# EAGLE board 6809 EXPANDED V2 SBC (EAGLE 7.7.0)
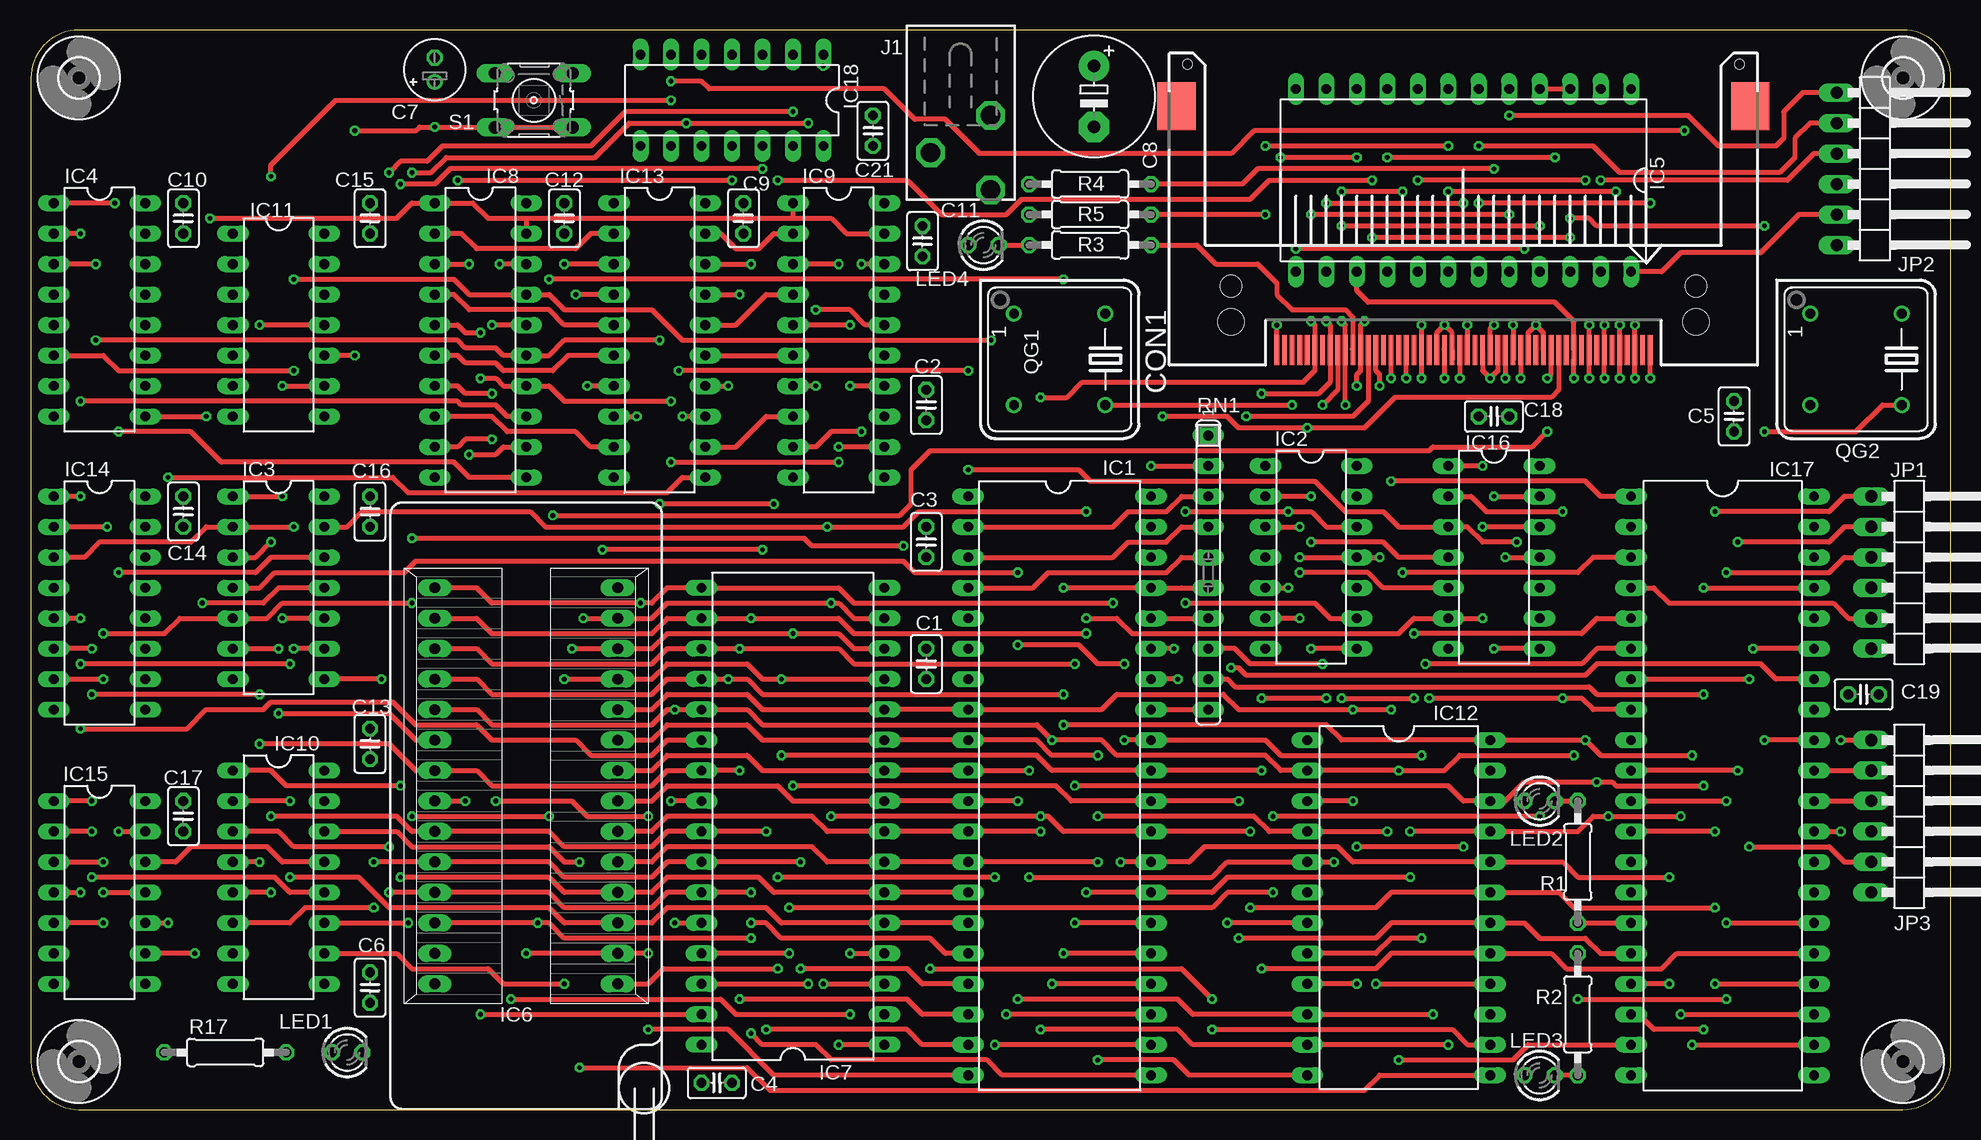
[diagram p0: board, top side]
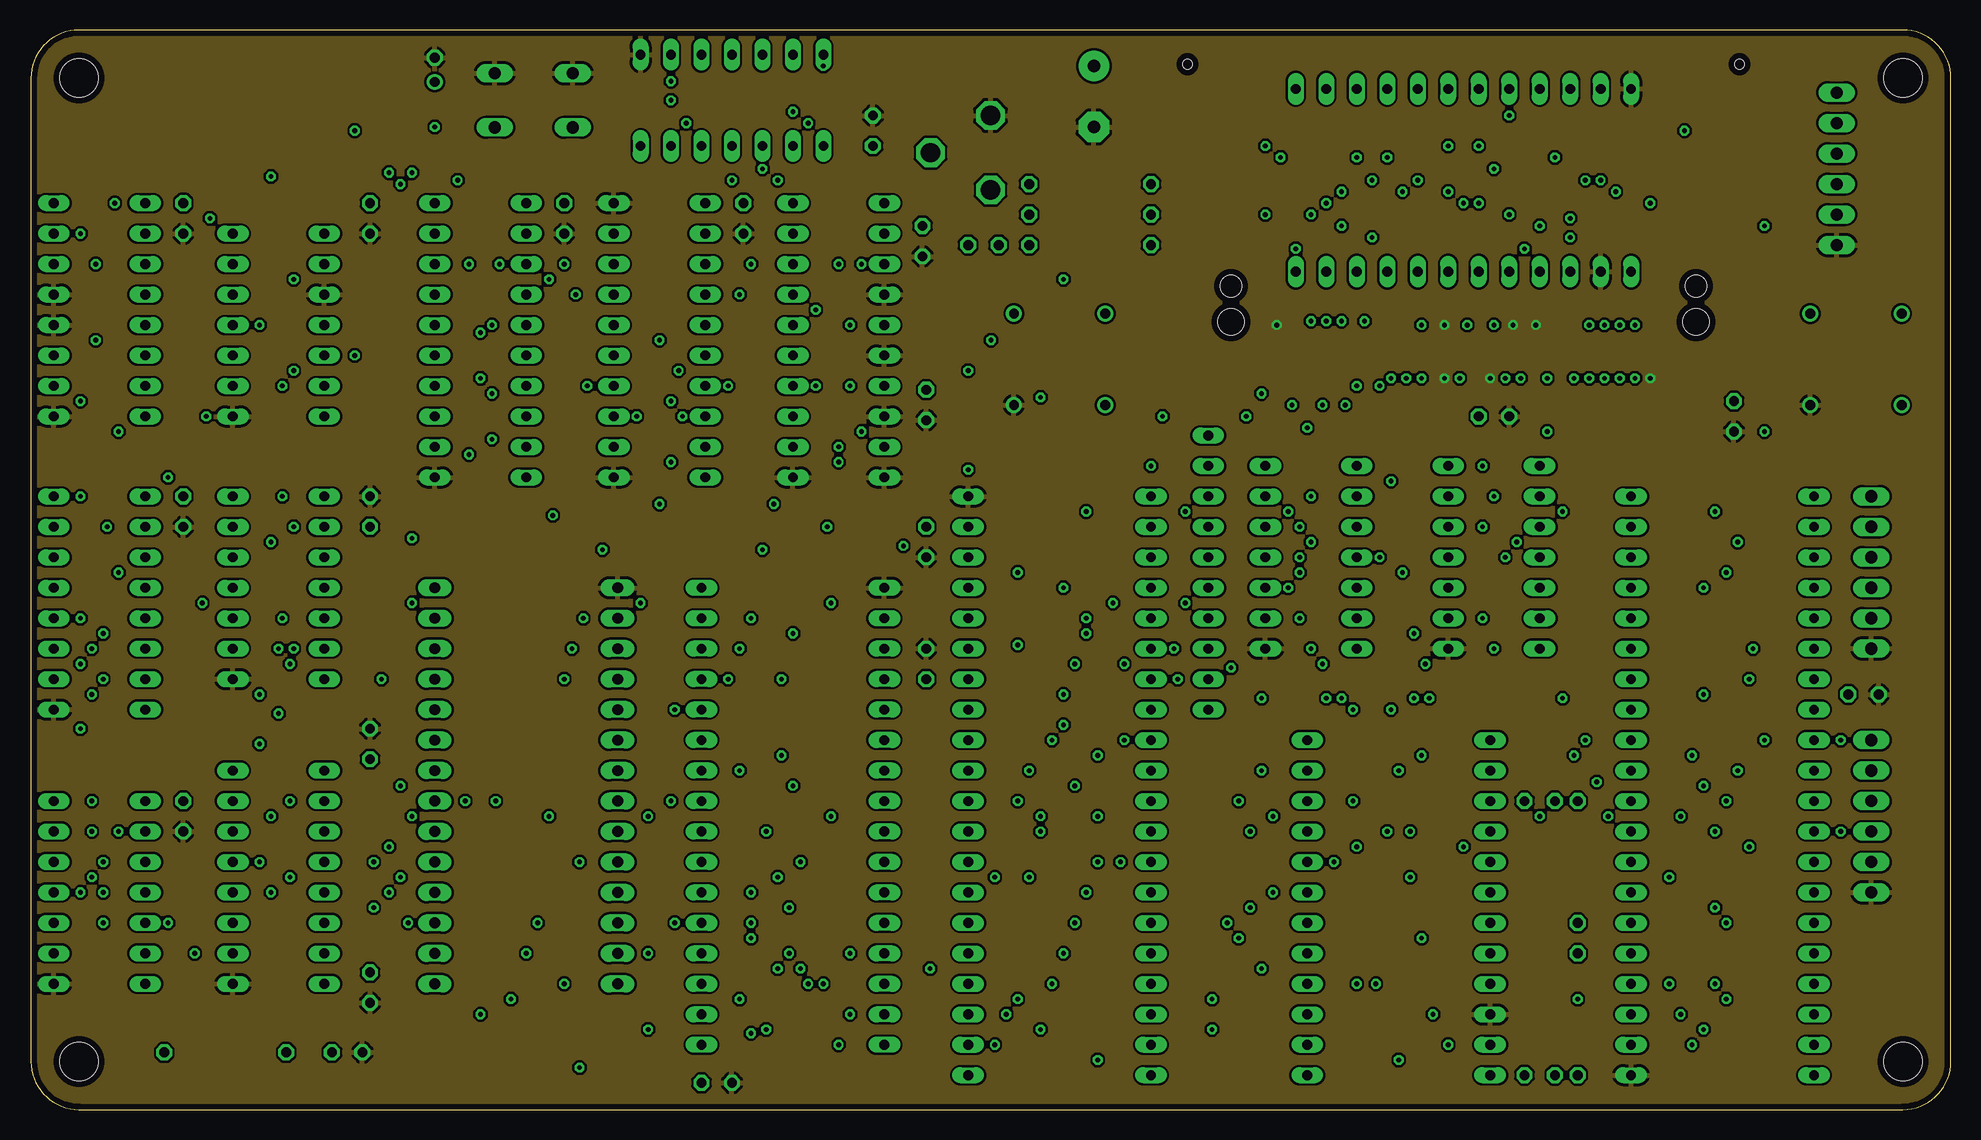
[diagram p1: board, inner layer Route2]
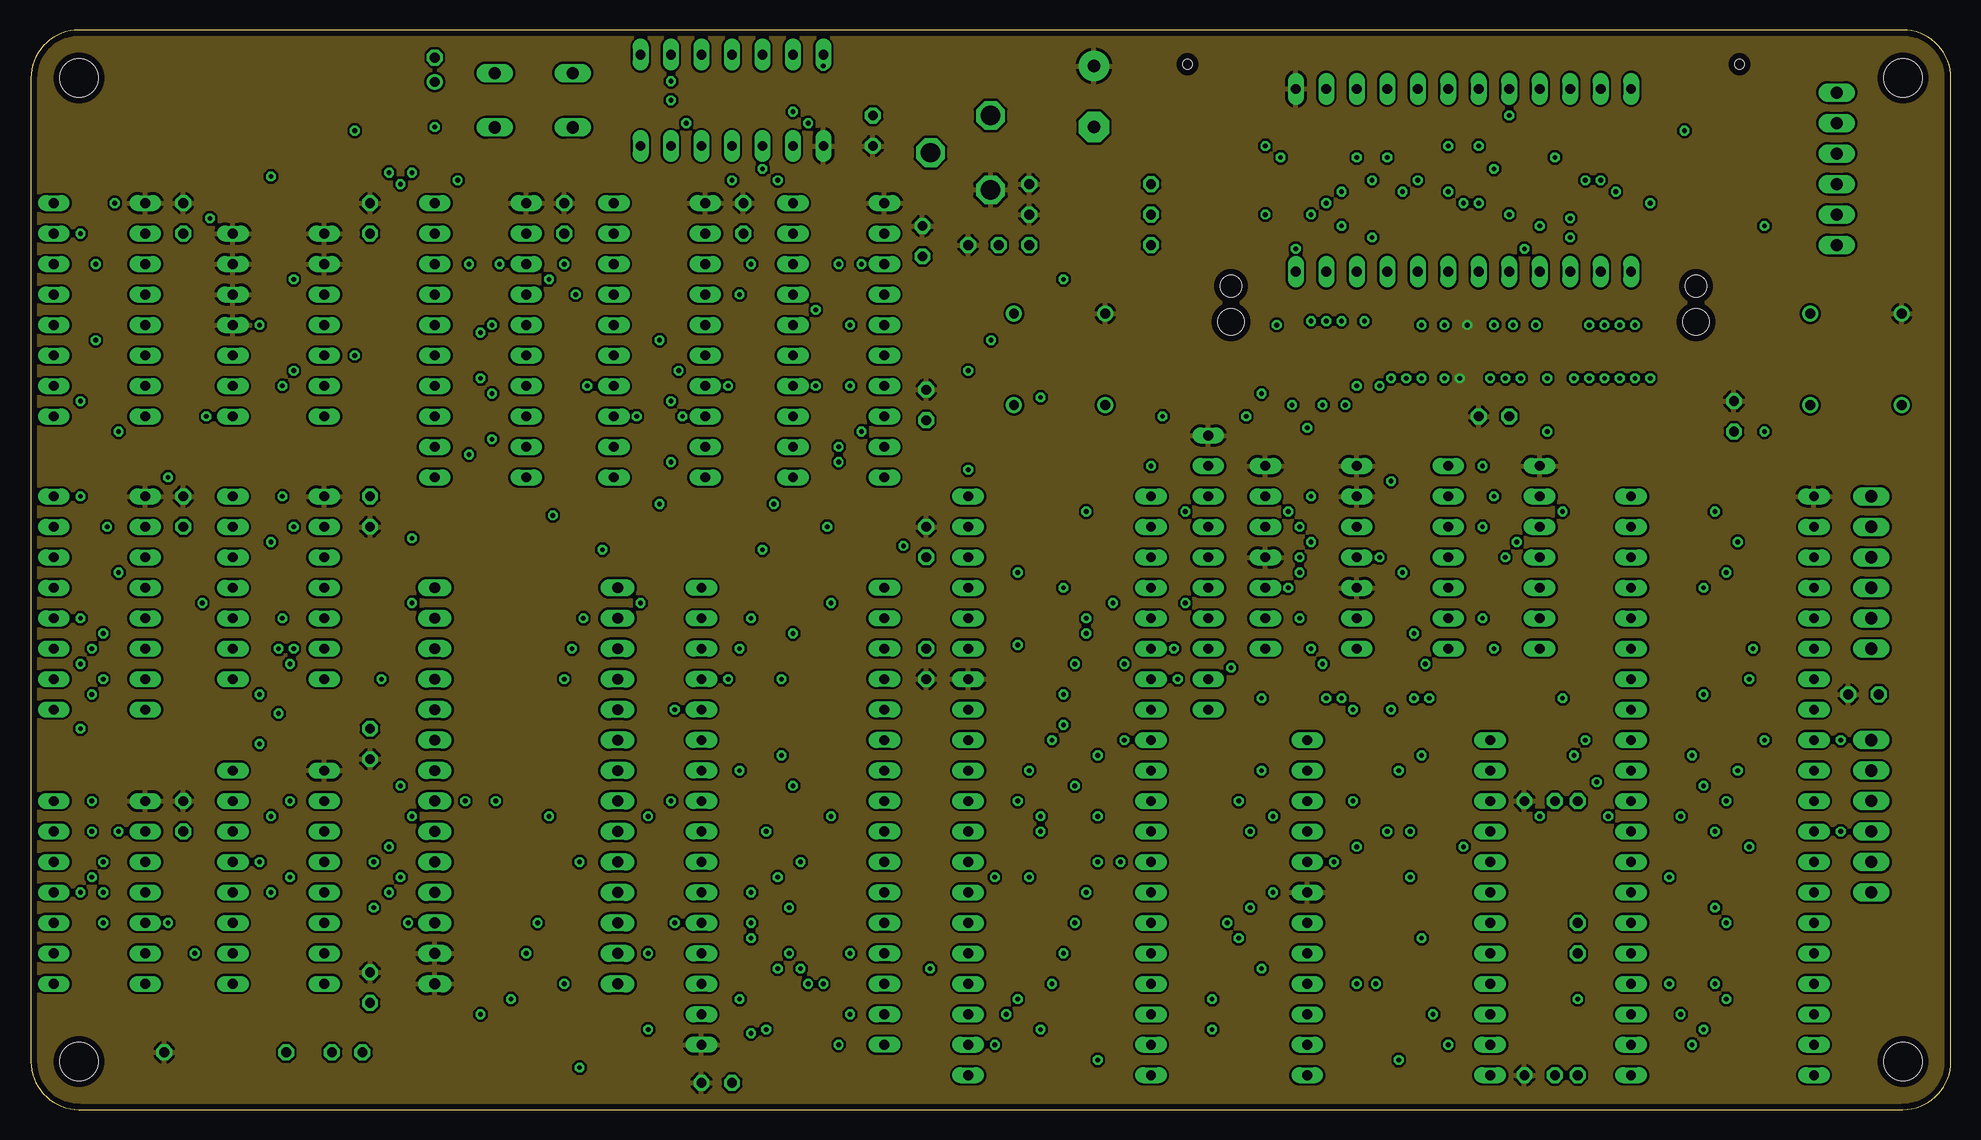
[diagram p2: board, inner layer Route15]
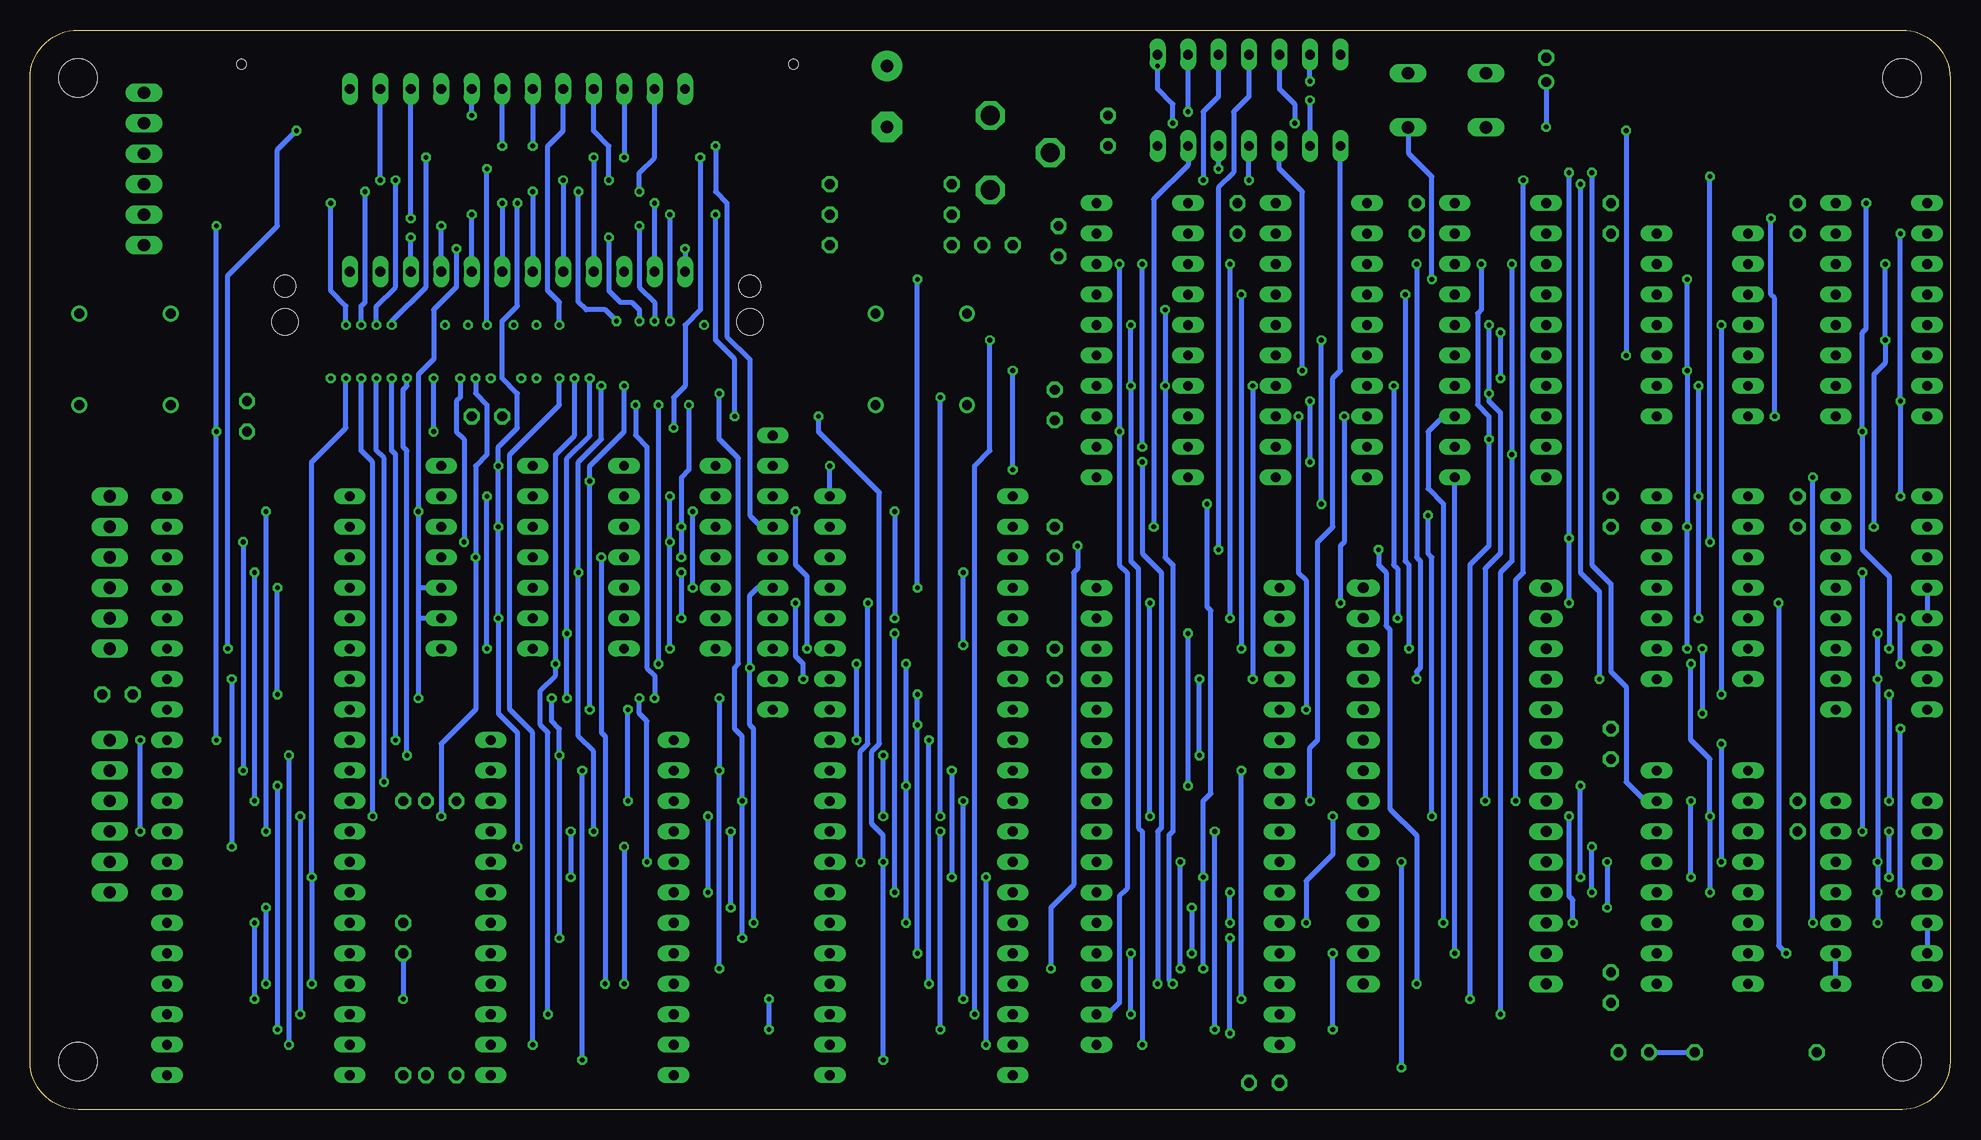
[diagram p3: board, bottom side, seen from below]

Size 160 x 90 mm. Coordinates in mm from the lower left corner, seen from the top.
Outline: 156,90 4,90 arc90 0,86 0,4 arc90 4,0 156,0 arc90 160,4 160,86 arc90 156,90
Copper layers (1*2*15*16): Top 0.035mm / dielectric 1.5mm / Route2 0.035mm / dielectric 0.15mm / Route15 0.035mm / dielectric 0.2mm / Bottom 0.035mm
Design rules "default *": minimum track width 10mil, minimum drill 12mil, track to track 8mil, track to pad 8mil, pad to pad 8mil, via to via 8mil, smd to smd 8mil, copper to edge 20mil, drill to drill 8mil, minimum pad ring 10mil, minimum via ring 8mil, stop-mask expansion 4mil, vias tented up to drill 0mil, thermal gap 10mil

## Footprints (pad centres in the part's own frame; a part is rotated, then mirrored left to right if it is on the bottom)
C025-025X050 = drill 0.813 octagon: 1 -1.27,0; 2 1.27,0
E2-5 = drill 0.813 pad 1.27: + -1.016,0 | drill 0.813 pad 1.27 octagon: - 1.016,0
E5-10,5 = drill 1.016 pad 2.54: + -2.54,0 | drill 1.016 pad 2.54 octagon: - 2.54,0
MI20-50PD-SF = smd 0.4 x 2.5: 1 15.557,-19.25; 2 14.287,-19.25; 3 13.018,-19.25; 4 11.748,-19.25; 5 10.477,-19.25; 6 9.207,-19.25; 7 7.938,-19.25; 8 6.668,-19.25; 9 5.397,-19.25; 10 4.128,-19.25; 11 2.857,-19.25; 12 1.587,-19.25; 13 0.318,-19.25; 14 -0.953,-19.25; 15 -2.223,-19.25; 16 -3.493,-19.25; 17 -4.763,-19.25; 18 -6.032,-19.25; 19 -7.303,-19.25; 20 -8.572,-19.25; 21 -9.842,-19.25; 22 -11.113,-19.25; 23 -12.383,-19.25; 24 -13.652,-19.25; 25 -14.922,-19.25; 26 14.922,-19.25; 27 13.652,-19.25; 28 12.383,-19.25; 29 11.113,-19.25; 30 9.842,-19.25; 31 8.572,-19.25; 32 7.303,-19.25; 33 6.032,-19.25; 34 4.763,-19.25; 35 3.493,-19.25; 36 2.223,-19.25; 37 0.953,-19.25; 38 -0.318,-19.25; 39 -1.587,-19.25; 40 -2.857,-19.25; 41 -4.128,-19.25; 42 -5.397,-19.25; 43 -6.668,-19.25; 44 -7.938,-19.25; 45 -9.207,-19.25; 46 -10.477,-19.25; 47 -11.748,-19.25; 48 -13.018,-19.25; 49 -14.287,-19.25; 50 -15.557,-19.25 | smd 3.2 x 4: M1 -23.9,1.1; M2 23.9,1.1 | hole 2.2: -19.37,-16.9; 19.37,-16.9 | hole 1.8: -19.37,-13.9; 19.37,-13.9 | hole 0.8: -23,4.6; 23,4.6
3,2 = hole 3.2: 0,0
DIL40 = drill 0.813 long: 1 -24.13,-7.62; 2 -21.59,-7.62; 3 -19.05,-7.62; 4 -16.51,-7.62; 5 -13.97,-7.62; 6 -11.43,-7.62; 7 -8.89,-7.62; 8 -6.35,-7.62; 9 -3.81,-7.62; 10 -1.27,-7.62; 11 1.27,-7.62; 12 3.81,-7.62; 13 6.35,-7.62; 14 8.89,-7.62; 15 11.43,-7.62; 16 13.97,-7.62; 17 16.51,-7.62; 18 19.05,-7.62; 19 21.59,-7.62; 20 24.13,-7.62; 21 24.13,7.62; 22 21.59,7.62; 23 19.05,7.62; 24 16.51,7.62; 25 13.97,7.62; 26 11.43,7.62; 27 8.89,7.62; 28 6.35,7.62; 29 3.81,7.62; 30 1.27,7.62; 31 -1.27,7.62; 32 -3.81,7.62; 33 -6.35,7.62; 34 -8.89,7.62; 35 -11.43,7.62; 36 -13.97,7.62; 37 -16.51,7.62; 38 -19.05,7.62; 39 -21.59,7.62; 40 -24.13,7.62
DIL14 = drill 0.813 long: 1 -7.62,-3.81; 2 -5.08,-3.81; 3 -2.54,-3.81; 4 0,-3.81; 5 2.54,-3.81; 6 5.08,-3.81; 7 7.62,-3.81; 8 7.62,3.81; 9 5.08,3.81; 10 2.54,3.81; 11 0,3.81; 12 -2.54,3.81; 13 -5.08,3.81; 14 -7.62,3.81
DIL16 = drill 0.813 long: 1 -8.89,-3.81; 2 -6.35,-3.81; 3 -3.81,-3.81; 4 -1.27,-3.81; 5 1.27,-3.81; 6 3.81,-3.81; 7 6.35,-3.81; 8 8.89,-3.81; 9 8.89,3.81; 10 6.35,3.81; 11 3.81,3.81; 12 1.27,3.81; 13 -1.27,3.81; 14 -3.81,3.81; 15 -6.35,3.81; 16 -8.89,3.81
DIL24 = drill 0.813 long: 1 -13.97,-7.62; 2 -11.43,-7.62; 3 -8.89,-7.62; 4 -6.35,-7.62; 5 -3.81,-7.62; 6 -1.27,-7.62; 7 1.27,-7.62; 8 3.81,-7.62; 9 6.35,-7.62; 10 8.89,-7.62; 11 11.43,-7.62; 12 13.97,-7.62; 13 13.97,7.62; 14 11.43,7.62; 15 8.89,7.62; 16 6.35,7.62; 17 3.81,7.62; 18 1.27,7.62; 19 -1.27,7.62; 20 -3.81,7.62; 21 -6.35,7.62; 22 -8.89,7.62; 23 -11.43,7.62; 24 -13.97,7.62
228-1277-00-0602J = drill 0.9 long: 1 -16.51,-7.62; 2 -13.97,-7.62; 3 -11.43,-7.62; 4 -8.89,-7.62; 5 -6.35,-7.62; 6 -3.81,-7.62; 7 -1.27,-7.62; 8 1.27,-7.62; 9 3.81,-7.62; 10 6.35,-7.62; 11 8.89,-7.62; 12 11.43,-7.62; 13 13.97,-7.62; 14 16.51,-7.62; 15 16.51,7.62; 16 13.97,7.62; 17 11.43,7.62; 18 8.89,7.62; 19 6.35,7.62; 20 3.81,7.62; 21 1.27,7.62; 22 -1.27,7.62; 23 -3.81,7.62; 24 -6.35,7.62; 25 -8.89,7.62; 26 -11.43,7.62; 27 -13.97,7.62; 28 -16.51,7.62
DIL32 = drill 0.813 long: 1 -19.05,-7.62; 2 -16.51,-7.62; 3 -13.97,-7.62; 4 -11.43,-7.62; 5 -8.89,-7.62; 6 -6.35,-7.62; 7 -3.81,-7.62; 8 -1.27,-7.62; 9 1.27,-7.62; 10 3.81,-7.62; 11 6.35,-7.62; 12 8.89,-7.62; 13 11.43,-7.62; 14 13.97,-7.62; 15 16.51,-7.62; 16 19.05,-7.62; 17 19.05,7.62; 18 16.51,7.62; 19 13.97,7.62; 20 11.43,7.62; 21 8.89,7.62; 22 6.35,7.62; 23 3.81,7.62; 24 1.27,7.62; 25 -1.27,7.62; 26 -3.81,7.62; 27 -6.35,7.62; 28 -8.89,7.62; 29 -11.43,7.62; 30 -13.97,7.62; 31 -16.51,7.62; 32 -19.05,7.62
DIL20 = drill 0.813 long: 1 -11.43,-3.81; 2 -8.89,-3.81; 3 -6.35,-3.81; 4 -3.81,-3.81; 5 -1.27,-3.81; 6 1.27,-3.81; 7 3.81,-3.81; 8 6.35,-3.81; 9 8.89,-3.81; 10 11.43,-3.81; 11 11.43,3.81; 12 8.89,3.81; 13 6.35,3.81; 14 3.81,3.81; 15 1.27,3.81; 16 -1.27,3.81; 17 -3.81,3.81; 18 -6.35,3.81; 19 -8.89,3.81; 20 -11.43,3.81
DIL24-6 = drill 0.813 long: 1 -13.97,-7.62; 2 -11.43,-7.62; 3 -8.89,-7.62; 4 -6.35,-7.62; 5 -3.81,-7.62; 6 -1.27,-7.62; 7 1.27,-7.62; 8 3.81,-7.62; 9 6.35,-7.62; 10 8.89,-7.62; 11 11.43,-7.62; 12 13.97,-7.62; 13 13.97,7.62; 14 11.43,7.62; 15 8.89,7.62; 16 6.35,7.62; 17 3.81,7.62; 18 1.27,7.62; 19 -1.27,7.62; 20 -3.81,7.62; 21 -6.35,7.62; 22 -8.89,7.62; 23 -11.43,7.62; 24 -13.97,7.62
FCR681465P = drill 1.6 octagon: 1 -6.2,-2.5; 2 -3.1,2.5; 3 0,-2.5
1X06/90 = drill 1.016 long: 1 -6.35,-3.81; 2 -3.81,-3.81; 3 -1.27,-3.81; 4 1.27,-3.81; 5 3.81,-3.81; 6 6.35,-3.81
LED3MM = drill 0.813 octagon: A -1.27,0; K 1.27,0
DIL08S = drill 0.813: 1 -3.81,-3.81; 4 3.81,-3.81; 5 3.81,3.81; 8 -3.81,3.81
0207/10 = drill 0.813 octagon: 1 -5.08,0; 2 5.08,0
SIL10 = drill 0.813 long: 1 -11.43,0; 2 -8.89,0; 3 -6.35,0; 4 -3.81,0; 5 -1.27,0; 6 1.27,0; 7 3.81,0; 8 6.35,0; 9 8.89,0; 10 11.43,0
B3F-10XX = drill 1.016 long: 1 -3.251,2.261; 2 3.251,2.261; 3 -3.251,-2.261; 4 3.251,-2.261

## Placement (x,y rotation side)
C1  [C025-025X050]  74.61,37.15 90 top
C2  [C025-025X050]  74.61,58.74 270 top
C3  [C025-025X050]  74.61,47.31 270 top
C4  [C025-025X050]  57.15,2.22 0 top
C5  [C025-025X050]  141.92,57.78 270 top
C6  [C025-025X050]  28.26,10.16 270 top
C7  [E2-5]  33.66,86.68 90 top
C8  470uF  [E5-10,5]  88.58,84.45 270 top
C9  [C025-025X050]  59.37,74.3 270 top
C10  [C025-025X050]  12.7,74.3 270 top
C11  [C025-025X050]  74.3,72.39 270 top
C12  [C025-025X050]  44.45,74.3 270 top
C13  [C025-025X050]  28.26,30.48 90 top
C14  [C025-025X050]  12.7,49.85 270 top
C15  [C025-025X050]  28.26,74.3 270 top
C16  [C025-025X050]  28.26,49.85 90 top
C17  [C025-025X050]  12.7,24.45 270 top
C18  [C025-025X050]  121.92,57.78 0 top
C19  [C025-025X050]  152.72,34.61 0 top
C21  [C025-025X050]  70.17,81.6 90 top
CON1  [MI20-50PD-SF]  119.38,82.55 0 top
H1  MOUNT-HOLE3.2  [3,2]  4,86 0 top
H2  MOUNT-HOLE3.2  [3,2]  156,86 0 top
H3  MOUNT-HOLE3.2  [3,2]  4,4 0 top
H4  MOUNT-HOLE3.2  [3,2]  156,4 0 top
IC1  [DIL40]  85.72,26.99 270 top
IC2  74HC74N  [DIL14]  106.68,46.04 270 top
IC3  74HC00N  [DIL14]  20.64,43.5 270 top
IC4  74HC138N  [DIL16]  5.71,66.67 270 top
IC5  [DIL24]  119.38,77.47 180 top
IC6  AT28C256ZIF  [228-1277-00-0602J]  41.27,26.99 90 top
IC7  [DIL32]  63.5,24.45 90 top
IC8  74HC241N  [DIL20]  37.47,64.14 270 top
IC9  74HC241N  [DIL20]  67.31,64.14 270 top
IC10  74HC138N  [DIL16]  20.64,19.37 270 top
IC11  74HC74N  [DIL14]  20.64,65.41 270 top
IC12  MC6859  [DIL24-6]  113.98,16.83 270 top
IC13  74HC373N  [DIL20]  52.39,64.14 270 top
IC14  74HC138N  [DIL16]  5.71,42.23 270 top
IC15  74HC02N  [DIL14]  5.71,18.1 270 top
IC16  74HC00N  [DIL14]  121.92,46.04 270 top
IC17  [DIL40]  140.97,26.99 270 top
IC18  74HC32N  [DIL14]  58.42,84.14 180 top
J1  FCR681465P  [FCR681465P]  77.47,82.87 90 top
JP1  [1X06/90]  157.16,44.77 270 top
JP2  [1X06/90]  154.31,78.42 270 top
JP3  [1X06/90]  157.16,24.45 270 top
LED1  [LED3MM]  26.35,4.76 0 top
LED2  [LED3MM]  125.73,25.72 0 top
LED3  [LED3MM]  125.73,2.86 0 top
LED4  [LED3MM]  79.38,72.07 0 top
QG1  [DIL08S]  85.72,62.55 270 top
QG2  [DIL08S]  152.08,62.55 270 top
R1  470R  [0207/10]  128.91,20.64 90 top
R2  470R  [0207/10]  128.91,7.94 270 top
R3  470R  [0207/10]  88.27,72.07 180 top
R4  2k2  [0207/10]  88.27,77.15 180 top
R5  2k2  [0207/10]  88.27,74.61 180 top
R17  470R  [0207/10]  16.19,4.76 0 top
RN1  [SIL10]  98.11,44.77 270 top
S1  [B3F-10XX]  41.91,84.14 180 top

## Library data of the parts
C1-C19 C21 R1-R5 R17 = rcl
CON1 = LTA_connectors; OC_FARNELL: unknown; OC_NEWARK: unknown
H1-H4 = holes
IC1 = micro-motorola; MF: NTE ELECTRONICS; MPN: NTE6809E; OC_FARNELL: unknown; OC_NEWARK: 31C5318
IC2-IC4 IC8-IC11 IC13-IC16 IC18 = 74xx-eu
IC5 = micro-motorola; MF: NTE ELECTRONICS; MPN: NTE6850; OC_FARNELL: 4899775; OC_NEWARK: 31C2457
IC6 IC7 IC12 = LTA_semis
IC17 = micro-mc68000; OC_FARNELL: unknown; OC_NEWARK: unknown
J1 = PowerCon
JP1-JP3 = pinhead
LED1-LED4 = led
QG1 QG2 = crystal; OC_FARNELL: unknown; OC_NEWARK: unknown
RN1 = resistor-sil; OC_FARNELL: unknown; OC_NEWARK: unknown
S1 = switch-omron; MPN: B3F-1000; OC_FARNELL: 176432; OC_NEWARK: 36M3542

## Nets
0V: C1.2 C2.2 C3.2 C4.2 C5.2 C6.2 C7.- C8.- C9.2 C10.2 C11.2 C12.2 C13.2 C14.2 C15.2 C16.2 C17.2 C18.2 C19.2 C21.2 CON1.1 CON1.8 CON1.9 CON1.10 CON1.11 CON1.12 CON1.14 CON1.15 CON1.39 CON1.50 IC1.1 IC2.7 IC3.7 IC4.4 IC4.5 IC4.8 IC5.1 IC5.23 IC6.14 IC7.16 IC8.10 IC9.10 IC9.11 IC9.13 IC9.15 IC9.17 IC10.8 IC11.7 IC11.12 IC12.15 IC13.1 IC13.10 IC14.8 IC15.7 IC16.7 IC17.20 IC18.7 J1.3 JP1.6 JP2.6 JP3.6 LED1.K QG1.4 QG2.4 S1.3 S1.4
+5V: C1.1 C2.1 C3.1 C4.1 C5.1 C6.1 C8.+ C9.1 C10.1 C11.1 C12.1 C13.1 C14.1 C15.1 C16.1 C17.1 C18.1 C19.1 C21.1 CON1.13 CON1.38 IC1.7 IC2.1 IC2.4 IC2.10 IC2.13 IC2.14 IC3.14 IC4.16 IC5.12 IC6.27 IC6.28 IC7.32 IC8.20 IC9.20 IC10.16 IC11.1 IC11.2 IC11.3 IC11.4 IC11.13 IC11.14 IC12.6 IC13.20 IC14.16 IC15.14 IC16.14 IC17.40 IC18.14 J1.1 LED2.A LED3.A LED4.A QG1.8 QG2.8 R4.2 R5.2 R17.1 RN1.1
A0: CON1.20 IC1.8 IC5.11 IC6.10 IC7.12 IC12.3 IC17.1
A1: CON1.19 IC1.9 IC6.9 IC7.11 IC12.4 IC17.3
A2: CON1.18 IC1.10 IC6.8 IC7.10 IC12.5 IC17.5
A3: CON1.17 IC1.11 IC6.7 IC7.9 IC12.10 IC17.6
A4: CON1.16 IC1.12 IC5.8 IC6.6 IC7.8 IC12.11
A5: CON1.7 IC1.13 IC5.10 IC6.5 IC7.7 IC12.12
A6: IC1.14 IC6.4 IC7.6 IC10.1
A7: IC1.15 IC6.3 IC7.5 IC10.2
A8: IC1.16 IC6.25 IC7.27 IC10.3
A9: IC1.17 IC6.24 IC7.26 IC10.6
A10: IC1.18 IC6.21 IC7.23 IC10.4
A11: IC1.19 IC6.23 IC7.25 IC10.5 IC14.4 IC14.5
A12: IC1.20 IC4.1 IC6.2 IC8.11 IC14.6
A13: IC1.21 IC4.2 IC6.26 IC8.13 IC14.1
A14: IC1.22 IC4.3 IC6.1 IC8.15 IC14.2
A15: IC1.23 IC3.2 IC3.9 IC4.6 IC8.17 IC14.3
CFEN: CON1.32 IC10.11
D0: CON1.21 IC1.31 IC5.22 IC6.11 IC7.13 IC12.17 IC13.3 IC17.25
D1: CON1.22 IC1.30 IC5.21 IC6.12 IC7.14 IC12.18 IC13.4 IC17.16
D2: CON1.23 IC1.29 IC5.20 IC6.13 IC7.15 IC12.19 IC13.7 IC17.24
D3: CON1.2 IC1.28 IC5.19 IC6.15 IC7.17 IC12.20 IC13.8 IC17.17
D4: CON1.3 IC1.27 IC5.18 IC6.16 IC7.18 IC12.21 IC13.18 IC17.23
D5: CON1.4 IC1.26 IC5.17 IC6.17 IC7.19 IC12.22 IC13.17 IC17.18
D6: CON1.5 IC1.25 IC5.16 IC6.18 IC7.20 IC12.24 IC13.14 IC17.22
D7: CON1.6 IC1.24 IC5.15 IC6.19 IC7.21 IC12.2 IC13.13 IC17.19
E+: IC3.13 IC5.14 IC12.9 IC16.1 IC16.6 IC16.12 IC18.13
IACK: IC17.37 RN1.9
IOSEL: IC3.5 IC12.14 IC14.7 IC15.3 IC15.5 IC15.6 IC15.11 IC18.1 IC18.5
N$1: IC2.6 IC16.5
N$2: IC2.2 IC2.8 IC16.4
N$3: IC2.3 IC2.11 IC12.16 QG1.5
N$4: IC1.4 RN1.5
N$5: IC1.35 IC2.5 IC2.12
N$6: IC3.12 IC15.13
N$7: IC10.13 IC15.12
N$8: IC3.11 IC15.8 IC15.9
N$9: IC1.34 IC2.9
N$10: IC17.35 IC18.6
N$11: IC3.1 IC3.10 IC11.9
N$12: IC7.22 IC15.4
N$13: IC10.12 IC15.2
N$14: IC3.3 IC18.9
N$15: IC11.11 IC15.1
N$16: IC7.24 IC18.8
N$17: IC6.22 IC18.11
N$18: IC9.2 IC13.19
N$19: IC13.11 IC15.10
N$21: IC16.8 IC16.13
N$23: IC3.8 IC18.12
N$24: IC10.14 IC12.13
N$25: IC5.5 JP2.1
N$26: LED1.A R17.2
N$28: IC17.31 JP3.2
N$29: IC17.30 JP3.3
N$30: IC1.40 RN1.2
N$31: IC17.11 JP1.3
N$32: IC17.10 JP1.2
N$33: IC3.6 IC6.20
N$34: IC17.7 JP3.5
N$35: IC17.4 JP1.5
N$36: IC1.36 RN1.7
N$37: IC1.33 RN1.10
N$38: IC1.3 IC5.7 RN1.4
N$39: IC17.29 JP3.1
N$40: IC5.24 JP2.5
N$41: LED3.K R2.2
N$42: IC1.2 RN1.3
N$43: IC17.12 JP1.1
N$44: LED2.K R1.2
N$45: IC5.6 JP2.2
N$46: IC5.2 JP2.3
N$47: IC4.9 IC8.1 IC8.19 IC9.1 IC9.19
N$48: IC7.4 IC8.9 IC8.18
N$49: IC7.28 IC8.7 IC8.16
N$50: IC7.3 IC8.5 IC8.14
N$51: IC7.31 IC8.3 IC8.12
N$52: IC9.8 IC13.12
N$53: IC10.15 IC18.2
N$54: IC9.4 IC13.16
N$55: IC9.6 IC13.15
N$56: IC7.2 IC9.9 IC9.18
N$57: IC7.30 IC9.7 IC9.16
N$58: IC7.1 IC9.5 IC9.14
N$59: IC9.3 IC9.12
N$60: IC17.26 R2.1
N$61: IC8.8 IC13.9
N$62: IC8.6 IC13.6
N$63: IC8.4 IC13.5
N$64: IC8.2 IC13.2
N$65: IC17.15 R1.1
N$66: CON1.45 R3.1
N$67: LED4.K R3.2
N$68: CON1.44 R5.1
N$69: CON1.36 R4.1
N$71: IC5.9 IC18.3
PDIAG: CON1.46 RN1.8
RDN: CON1.34 IC16.3 IC18.10
RESET: C7.+ IC1.37 IC11.10 IC12.7 IC17.34 RN1.6 S1.1 S1.2
RW: IC1.32 IC3.4 IC5.13 IC12.8 IC16.2 IC16.9 IC16.10 IC17.8
SCLK: IC5.3 IC5.4 IC17.32 QG2.5
SEREN: IC10.10 IC18.4
WRN: CON1.35 IC7.29 IC16.11

## Tracks (layer width: path | path; a pad name or v marks a point on that pad's centre or on a via)
0V  (via drill 0.4)
  Top 0.406: v103.82,65.41 CON1.50 103.82,62.5 | v134.94,60.96 CON1.1 | v123.51,65.41 CON1.10 123.51,62.5 | CON1.11 122.24,61.59 v121.6,60.96 120.97,61.59 CON1.12 | 117.16,62.5 CON1.15 117.16,64.77 v117.79,65.41 118.43,64.77 CON1.14 118.43,62.5 | 126.05,62.5 CON1.8 126.05,64.77 v125.41,65.41 124.78,64.77 CON1.9 124.78,62.5 | CON1.39 117.79,62.87 | CON1.39 117.79,63.5 | CON1.39 v117.79,60.96
  pour Route2: 0.64,0.64 0.64,99.38 159.38,99.38 159.38,0.64
+5V  (via drill 0.4)
  Top 0.406: CON1.38 v119.06,60.96 | v119.7,65.41 CON1.13 119.7,62.5
  pour Route15: 0.32,0.32 0.32,99.69 159.7,99.69 159.7,0.32
A0  (via drill 0.4)
  Top 0.406: IC6.10 51.75,33.34 53.02,34.61 59.69,34.61 60.96,33.34 IC7.12 IC1.8 89.22,33.34 90.49,34.61 99.38,34.61 100.65,33.34 v110.17,33.34 v113.35,33.34 | v110.49,60.33 110.49,61.28 110.81,61.59 110.81,63.18 CON1.20 110.81,65.41 v111.12,65.72 | v110.17,25.72 IC12.3 | IC17.1 130.81,51.12 129.54,52.39 v113.35,52.39 | v114.3,76.52 v109.22,76.52
  Bottom 0.406: v110.17,25.72 v110.17,33.34 | v113.35,33.34 v113.35,52.39 113.35,53.66 110.49,56.52 v110.49,60.33 | v111.12,65.72 112.08,66.67 113.67,66.67 114.3,67.31 v114.3,76.52 | v109.22,76.52 109.22,78.11 107.95,79.38 IC5.11
A1  (via drill 0.4)
  Top 0.406: IC6.9 51.75,30.8 53.02,32.07 59.69,32.07 60.96,30.8 IC7.11 IC1.9 83.82,30.8 85.09,29.53 v88.9,29.53 | v88.9,24.45 101.92,24.45 103.19,23.18 IC12.4 v113.03,23.18 | v112.39,60.33 112.39,61.28 112.08,61.59 CON1.19 | IC17.3 130.18,46.04 128.91,44.77 v114.3,44.77
  Bottom 0.406: v88.9,24.45 v88.9,29.53 | v113.03,23.18 113.03,29.84 114.3,31.11 v114.3,44.77 114.3,53.98 112.39,55.88 v112.39,60.33
A2  (via drill 0.4)
  Top 0.406: IC6.8 51.75,28.26 53.02,29.53 59.69,29.53 60.96,28.26 IC7.10 IC1.10 v83.19,28.26 | v83.19,19.37 98.42,19.37 99.69,20.64 IC12.5 v108.58,20.64 | v109.22,34.29 v115.25,34.29 | v113.35,60.96 CON1.18 | IC17.5 130.49,40.96 129.22,39.69 v115.25,39.69
  Bottom 0.406: v83.19,28.26 v83.19,19.37 | v108.58,20.64 108.58,32.38 109.22,33.02 v109.22,34.29 | v115.25,34.29 v115.25,39.69 115.25,54.29 113.35,56.2 v113.35,60.96
A3  (via drill 0.4)
  Top 0.406: IC6.7 51.75,25.72 53.02,26.99 62.23,26.99 63.5,25.72 IC7.9 IC1.11 v82.23,25.72 | v82.23,9.21 95.57,9.21 96.84,7.94 IC12.10 v116.84,7.94 | v114.62,60.96 CON1.17 | IC17.6 130.49,38.42 129.22,37.15 v116.2,37.15
  Bottom 0.406: v82.23,9.21 v82.23,25.72 | v116.84,7.94 116.84,31.43 117.47,32.07 117.47,34.92 116.2,36.2 v116.2,37.15 116.2,54.61 114.62,56.2 v114.62,60.96
A4  (via drill 0.4)
  Top 0.406: IC6.6 51.75,23.18 53.02,24.45 65.09,24.45 66.36,23.18 IC7.8 IC1.12 v84.14,23.18 | v84.14,6.67 95.57,6.67 96.84,5.4 IC12.11 v118.11,5.4 | v115.89,60.96 CON1.16 115.89,63.82 v115.89,65.41
  Bottom 0.406: v84.14,6.67 v84.14,23.18 | v118.11,5.4 118.11,31.43 120.02,33.34 120.02,54.61 115.89,58.74 v115.89,60.96 | v115.89,65.41 115.89,67.31 116.84,68.26 116.84,80.33 115.57,81.6 IC5.8
A5  (via drill 0.4)
  Top 0.406: IC6.5 51.75,20.64 53.02,21.91 65.09,21.91 66.36,20.64 IC7.7 IC1.13 v88.9,20.64 | IC12.12 96.52,2.86 95.25,4.13 v88.9,4.13 | CON1.7 127.32,60.01 126.68,59.37 113.67,59.37 111.12,56.83 v106.36,56.83 100.65,56.83 99.69,57.78 v94.3,57.78 | v110.49,79.38 v104.14,79.38
  Bottom 0.406: v88.9,4.13 v88.9,20.64 88.9,22.86 89.85,23.81 89.85,29.84 89.22,30.48 89.22,51.44 94.3,56.52 v94.3,57.78 | IC5.10 v110.49,79.38 | v104.14,79.38 104.14,66.67 105.41,65.41 105.41,60.33 106.36,59.37 v106.36,56.83
A6  (via drill 0.4)
  Top 0.406: IC1.14 IC7.6 61.91,18.1 60.64,19.37 53.02,19.37 51.75,18.1 IC6.4 44.45,18.1 43.18,19.37 v30.8,19.37 | v30.8,26.99 21.27,26.99 20,28.26 IC10.1
  Bottom 0.406: 50.16,18.1 IC6.4 | v30.8,19.37 v30.8,26.99
A7  (via drill 0.4)
  Top 0.406: IC1.15 IC7.5 62.55,15.56 61.28,16.83 53.02,16.83 51.75,15.56 IC6.3 44.45,15.56 43.18,16.83 29.84,16.83 27.3,19.37 v21.59,19.37 | v21.59,25.72 IC10.2
  Bottom 0.406: v21.59,19.37 v21.59,25.72
A8  (via drill 0.4)
  Top 0.406: IC1.16 76.2,13.02 74.93,14.29 62.55,14.29 61.28,15.56 v60.01,15.56 | v60.01,18.1 IC7.27 53.02,18.1 51.75,16.83 44.45,16.83 43.18,18.1 IC6.25 v29.84,18.1 | v29.84,21.91 21.91,21.91 20.64,23.18 IC10.3
  Bottom 0.406: v60.01,15.56 v60.01,18.1 | v29.84,18.1 v29.84,21.91
A9  (via drill 0.4)
  Top 0.406: IC1.17 74.3,10.48 73.03,11.75 v64.14,11.75 | v64.14,20.64 IC7.26 53.02,20.64 51.75,19.37 44.45,19.37 43.18,20.64 IC6.24 v28.57,20.64 | v28.57,16.83 22.86,16.83 21.59,15.56 IC10.6
  Bottom 0.406: v64.14,11.75 v64.14,20.64 | v28.57,20.64 v28.57,16.83
A10  (via drill 0.4)
  Top 0.406: IC1.18 74.3,7.94 73.03,9.21 v59.05,9.21 | v59.05,28.26 IC7.23 53.02,28.26 51.75,26.99 38.42,26.99 37.15,28.26 IC6.21 32.07,28.26 29.84,30.48 v19.05,30.48 | v19.05,20.64 IC10.4
  Bottom 0.406: v59.05,9.21 v59.05,28.26 | v19.05,30.48 v19.05,20.64
A11  (via drill 0.4)
  Top 0.406: IC1.19 74.3,5.4 73.03,6.67 v61.28,6.67 | v61.28,23.18 IC7.25 53.02,23.18 51.75,21.91 44.45,21.91 43.18,23.18 IC6.23 31.75,23.18 30.48,24.45 v20,24.45 | v20,18.1 IC10.5 | v21.59,37.15 v4.13,37.15 | v4.13,40.96 IC14.5
  Bottom 0.406: v61.28,6.67 v61.28,23.18 | v20,18.1 v20,24.45 20,29.21 21.59,30.8 v21.59,37.15 | IC14.4 IC14.5 | v4.13,37.15 v4.13,40.96
A12  (via drill 0.4)
  Top 0.406: IC1.20 61.91,2.86 58.1,6.67 v51.44,6.67 | v51.44,13.02 IC6.2 v41.27,13.02 | IC8.11 36.51,52.7 35.24,53.98 15.88,53.98 13.34,56.52 v7.3,56.52 | v6.99,75.56 IC4.1 | v5.08,38.42 IC14.6
  Bottom 0.406: v51.44,6.67 v51.44,13.02 | v41.27,13.02 IC8.11 | v6.99,75.56 6.99,65.09 7.3,64.77 v7.3,56.52 7.3,46.67 5.08,44.45 v5.08,38.42
A13  (via drill 0.4)
  Top 0.406: IC1.21 80.96,2.86 79.69,4.13 66.67,4.13 65.41,5.4 60.96,5.4 v60.01,6.35 | v60.01,14.29 44.45,14.29 43.18,15.56 v42.23,15.56 IC6.26 | IC8.13 39.69,57.78 38.73,58.74 35.88,58.74 35.56,59.05 v4.13,59.05 | v4.13,73.03 IC4.2 | v4.13,51.12 IC14.1
  Bottom 0.406: v60.01,6.35 v60.01,14.29 | IC8.13 42.23,57.78 43.5,56.52 43.5,51.75 42.23,50.48 v42.23,15.56 | v4.13,73.03 v4.13,59.05 v4.13,51.12
A14  (via drill 0.4)
  Top 0.406: IC1.22 v80.33,5.4 | v80.33,19.37 v62.23,19.37 | IC6.1 51.44,10.48 52.7,11.75 v62.23,11.75 | v61.91,50.48 v52.39,50.48 | v52.39,64.14 44.45,64.14 43.18,62.87 IC8.15 39.37,62.87 38.73,63.5 36.2,63.5 35.56,64.14 v5.4,64.14 | v5.4,70.48 IC4.3 | v6.35,48.58 IC14.2
  Bottom 0.406: v80.33,5.4 v80.33,19.37 | v61.91,50.48 61.91,41.91 61.59,41.59 61.59,26.35 62.23,25.72 v62.23,19.37 v62.23,11.75 | v52.39,50.48 v52.39,64.14 | v5.4,70.48 v5.4,64.14 5.4,62.23 6.35,61.28 v6.35,48.58
A15  (via drill 0.4)
  Top 0.406: IC1.23 v81.28,7.94 | v80.01,64.14 54.29,64.14 51.75,66.67 44.45,66.67 43.18,67.94 IC8.17 36.51,67.94 35.24,69.22 v21.91,69.22 | IC4.6 6.03,62.87 7.3,61.59 v21.91,61.59 | IC14.3 4.45,46.04 5.71,47.31 13.34,47.31 14.61,48.58 IC3.2 v21.91,48.58 | IC3.9 v21.91,38.42
  Bottom 0.406: v81.28,7.94 81.28,53.66 80.01,54.93 v80.01,64.14 | v21.91,69.22 v21.91,61.59 v21.91,48.58 v21.91,38.42
CFEN  (via drill 0.4)
  Top 0.406: IC10.11 v31.43,15.56 | v31.75,24.45 v43.18,24.45 | v43.5,49.53 72.39,49.53 73.34,50.48 73.34,53.34 74.93,54.93 116.52,54.93 116.84,55.24 125.09,55.24 v126.36,56.52 | v126.36,60.96 126.68,61.28 CON1.32
  Bottom 0.406: v31.43,15.56 31.43,17.46 31.75,17.78 v31.75,24.45 | v43.18,24.45 43.18,46.04 43.5,46.35 v43.5,49.53 | v126.36,56.52 v126.36,60.96
D0  (via drill 0.4)
  Top 0.406: v62.55,29.53 83.82,29.53 85.09,28.26 IC1.31 v102.55,28.26 | IC7.13 v62.55,35.88 60.96,35.88 59.69,37.15 53.02,37.15 51.75,35.88 IC6.11 v44.45,35.88 | IC13.3 v44.45,70.48 | v102.55,11.75 112.08,11.75 113.35,13.02 IC12.17 126.68,13.02 127.95,11.75 135.89,11.75 137.16,13.02 IC17.25 | v109.54,58.74 CON1.21 109.54,65.41 v109.22,65.72 | v107.95,34.29 v102.55,34.29 | v128.27,72.71 v111.76,72.71
  Bottom 0.406: v62.55,29.53 v62.55,35.88 | v44.45,70.48 44.45,46.04 44.13,45.72 44.13,36.83 44.45,36.51 v44.45,35.88 | v102.55,11.75 v102.55,28.26 v102.55,34.29 | v109.54,58.74 109.54,56.2 108.58,55.24 108.58,36.83 107.95,36.2 v107.95,34.29 | IC5.22 v128.27,72.71 | v111.76,72.71 111.76,68.26 110.81,67.31 109.86,67.31 109.22,66.67 v109.22,65.72
D1  (via drill 0.4)
  Top 0.406: v63.5,26.99 85.41,26.99 86.68,25.72 IC1.30 v100.65,25.72 | IC7.14 68.58,38.42 67.31,39.69 v63.5,39.69 53.02,39.69 51.75,38.42 IC6.12 v45.09,38.42 | IC13.4 v45.4,67.94 | v100.65,14.29 112.08,14.29 113.35,15.56 IC12.18 124.46,15.56 125.73,14.29 129.54,14.29 130.81,13.02 IC17.16 | v102.55,59.69 107.31,59.69 108.27,60.64 CON1.22 108.27,63.82 108.27,65.41 v107.95,65.72 | v125.73,73.66 v109.22,73.66
  Bottom 0.406: v63.5,26.99 v63.5,39.69 | v45.4,67.94 45.4,45.72 45.09,45.4 v45.09,38.42 | v100.65,14.29 v100.65,25.72 100.65,31.11 101.28,31.75 101.28,36.83 100.97,37.15 100.97,54.29 102.55,55.88 v102.55,59.69 | IC5.21 v125.73,73.66 | v109.22,73.66 109.22,68.58 107.95,67.31 v107.95,65.72
D2  (via drill 0.4)
  Top 0.406: v66.67,24.45 v84.14,24.45 84.77,24.45 86.04,23.18 IC1.29 v101.6,23.18 | IC7.15 68.58,40.96 67.31,42.23 v66.67,42.23 53.02,42.23 51.75,40.96 IC6.13 v46.04,40.96 | IC13.7 v46.35,60.33 | v101.6,16.83 112.08,16.83 113.35,18.1 IC12.19 127.32,18.1 128.59,16.83 v140.34,16.83 | v84.14,59.37 86.36,59.37 87.63,60.64 106.05,60.64 107,61.59 CON1.23 107,65.41 v106.68,65.72 | v140.34,10.48 IC17.24 | v123.19,74.61 v106.68,74.61
  Bottom 0.406: v66.67,24.45 v66.67,42.23 | v46.35,60.33 46.35,45.4 46.04,45.09 v46.04,40.96 | v101.6,16.83 v101.6,23.18 | v84.14,24.45 v84.14,59.37 | v140.34,16.83 v140.34,10.48 | IC5.20 v123.19,74.61 | v106.68,74.61 v106.68,65.72
D3  (via drill 0.4)
  Top 0.406: v90.17,42.23 68.58,42.23 67.31,43.5 IC7.17 53.02,43.5 51.75,42.23 v50.8,42.23 38.42,42.23 37.15,43.5 IC6.15 | v90.81,20.64 IC1.28 96.52,20.64 97.79,21.91 108.9,21.91 110.17,20.64 IC12.20 127.64,20.64 128.91,19.37 v136.53,19.37 | IC13.8 v50.48,57.78 | v136.53,10.48 IC17.17 | v133.67,60.96 CON1.2 v133.67,65.41 | v134.94,75.56 v120.65,75.56
  Bottom 0.406: v90.81,20.64 90.81,29.84 90.17,30.48 v90.17,42.23 | v50.48,57.78 50.48,47.31 50.8,46.99 v50.8,42.23 | v133.67,60.96 133.67,56.83 136.53,53.98 v136.53,19.37 v136.53,10.48 | v133.67,65.41 133.67,66.99 134.94,68.26 v134.94,75.56 | v120.65,75.56 IC5.19
D4  (via drill 0.4)
  Top 0.406: v87.95,39.69 68.58,39.69 67.31,40.96 v60.01,40.96 IC7.18 53.02,40.96 51.75,39.69 38.42,39.69 37.15,40.96 IC6.16 | v87.95,18.1 IC1.27 98.42,18.1 99.69,19.37 v114.94,19.37 | IC13.18 v60.01,70.48 | v114.94,23.18 IC12.21 128.91,23.18 130.18,24.45 v131.44,24.45 v137.48,24.45 | v137.48,7.94 IC17.23 | v132.4,60.96 CON1.3 132.4,63.82 v132.4,65.41 | v132.08,76.52 v118.11,76.52
  Bottom 0.406: v87.95,18.1 v87.95,39.69 | v60.01,70.48 v60.01,40.96 | v114.94,23.18 v114.94,19.37 | v131.44,24.45 131.44,53.98 132.4,54.93 v132.4,60.96 | v137.48,24.45 v137.48,7.94 | v132.4,65.41 132.4,66.99 132.08,67.31 v132.08,76.52 | v118.11,76.52 IC5.18
D5  (via drill 0.4)
  Top 0.406: v87,37.15 68.58,37.15 67.31,38.42 v59.05,38.42 IC7.19 53.02,38.42 51.75,37.15 38.42,37.15 37.15,38.42 IC6.17 | IC1.26 v87,15.56 | IC13.17 v59.05,67.94 | v87,26.99 118.11,26.99 119.38,25.72 IC12.22 122.87,25.72 124.46,27.3 v130.49,27.3 131.76,27.3 132.08,26.99 v139.38,26.99 | v139.38,6.67 135.25,6.67 133.99,7.94 IC17.18 | v131.13,60.96 CON1.4 131.13,63.82 v131.13,65.41 | v129.54,77.47 v115.57,77.47
  Bottom 0.406: v87,15.56 v87,26.99 v87,37.15 | v59.05,67.94 v59.05,38.42 | v130.49,27.3 130.49,54.29 131.13,54.93 v131.13,60.96 | v139.38,26.99 v139.38,6.67 | v131.13,65.41 131.13,66.99 129.54,68.58 v129.54,77.47 | v115.57,77.47 IC5.17
D6  (via drill 0.4)
  Top 0.406: v86.04,34.61 60.96,34.61 59.69,35.88 v58.1,35.88 IC7.20 53.02,35.88 51.75,34.61 38.42,34.61 37.15,35.88 IC6.18 | IC1.25 v86.04,13.02 | IC13.14 v58.1,60.33 | v86.04,32.07 107.95,32.07 109.22,30.8 IC12.24 v129.54,30.8 130.81,29.53 v138.43,29.53 | v138.43,5.4 IC17.22 | v129.86,60.96 CON1.5 129.86,63.82 v129.86,65.41 | v127,79.38 v113.03,79.38
  Bottom 0.406: v86.04,13.02 v86.04,32.07 v86.04,34.61 | v58.1,60.33 v58.1,35.88 | v129.54,30.8 129.54,54.61 129.86,54.93 v129.86,60.96 | v138.43,29.53 v138.43,5.4 | v129.86,65.41 129.86,65.72 127,68.58 v127,79.38 | v113.03,79.38 IC5.16
D7  (via drill 0.4)
  Top 0.406: IC1.24 v85.09,10.48 | IC6.19 37.15,33.34 38.42,32.07 51.75,32.07 53.02,33.34 v53.66,33.34 IC7.21 59.69,33.34 60.96,32.07 83.82,32.07 v85.09,30.8 89.22,30.8 90.49,29.53 102.87,29.53 104.14,28.26 IC12.2 v113.98,28.26 117.79,28.26 119.06,29.53 v128.59,29.53 | IC13.13 v54.29,57.78 | v113.98,4.13 123.51,4.13 124.78,5.4 IC17.19 | v128.59,60.96 128.59,62.55 CON1.6 128.59,65.72 127,67.31 111.44,67.31 110.49,68.26 IC5.15
  Bottom 0.406: v85.09,10.48 v85.09,30.8 | v54.29,57.78 54.29,44.77 53.66,44.13 v53.66,33.34 | v113.98,4.13 v113.98,28.26 | v128.59,29.53 128.59,54.93 128.91,55.24 128.91,60.01 128.59,60.33 v128.59,60.96
E+  (via drill 0.4)
  Top 0.406: v110.49,10.48 IC12.9 | v119.38,21.91 v110.49,21.91 | IC3.13 26.35,48.58 27.62,49.85 41.59,49.85 42.86,48.58 v66.36,48.58 72.71,48.58 73.98,49.85 v87.95,49.85 | v120.97,40.96 IC16.6 115.25,40.96 113.98,39.69 91.76,39.69 90.49,40.96 v87.95,40.96 | v120.97,53.66 IC16.1 | IC16.12 v120.97,48.58 | v107.95,75.56 v119.38,75.56
  Bottom 0.406: v110.49,21.91 v110.49,10.48 | v119.38,21.91 119.38,31.43 120.97,33.02 v120.97,40.96 v120.97,48.58 v120.97,53.66 120.97,55.24 119.38,56.83 119.38,59.69 120.65,60.96 120.65,65.72 119.38,66.99 v119.38,75.56 | v87.95,49.85 v87.95,40.96 | IC5.14 v107.95,75.56 | IC18.13 63.5,78.74 66.36,75.88 v66.36,48.58
IACK  (via drill 0.4)
  Top 0.406: RN1.9 99.69,35.88 100.33,35.24 129.86,35.24 130.49,34.61 v139.38,34.61 | v139.38,43.5 IC17.37
  Bottom 0.406: v139.38,34.61 v139.38,43.5
IOSEL  (via drill 0.4)
  Top 0.406: IC14.7 v6.03,35.88 | v6.03,39.69 11.11,39.69 12.38,40.96 IC3.5 19.68,40.96 20.95,42.23 v31.75,42.23 | v6.03,18.1 IC15.11 | IC15.3 v6.03,20.64 | v31.75,78.11 33.34,78.11 34.61,79.38 46.99,79.38 49.85,82.23 v54.61,82.23 v64.77,82.23 | v66.04,87 IC18.1 | v74.93,11.75 95.89,11.75 v98.42,9.21 | v98.42,6.67 118.43,6.67 119.7,5.4 IC12.14 | v72.71,46.99 65.09,46.99 64.45,47.62 v31.75,47.62 | v6.03,15.56 IC15.5
  Bottom 0.406: v6.03,39.69 v6.03,35.88 v6.03,20.64 v6.03,18.1 v6.03,15.56 | v31.75,42.23 v31.75,47.62 v31.75,78.11 | v64.77,82.23 64.77,83.82 66.04,85.09 v66.04,87 | IC18.5 55.88,85.09 54.61,83.82 v54.61,82.23 | v72.71,46.99 72.71,45.09 73.03,44.77 73.03,18.73 74.93,16.83 v74.93,11.75 | v98.42,9.21 v98.42,6.67 | IC15.5 IC15.6
N$1  (via drill 0.4)
  Top 0.406: IC16.5 112.71,43.5 111.44,44.77 v105.73,44.77 | v105.73,40.96 IC2.6
  Bottom 0.406: v105.73,44.77 v105.73,40.96
N$2  (via drill 0.4)
  Top 0.406: IC2.8 v106.68,38.42 | v106.68,51.12 IC2.2 | IC16.4 113.98,46.04 112.71,47.31 v106.68,47.31
  Bottom 0.406: v106.68,38.42 v106.68,47.31 v106.68,51.12
N$3  (via drill 0.4)
  Top 0.406: IC2.3 v105.73,48.58 | v105.73,46.04 IC2.11 v112.39,46.04 | QG1.5 v105.09,58.74 | v112.08,10.48 IC12.16
  Bottom 0.406: v105.73,46.04 v105.73,48.58 105.73,52.7 105.09,53.34 v105.09,58.74 | v112.39,46.04 112.39,31.43 112.08,31.11 v112.08,10.48
N$4
  Top 0.406: IC1.4 83.5,43.5 84.77,44.77 94.61,44.77 95.89,46.04 RN1.5
N$5  (via drill 0.4)
  Top 0.406: IC2.12 107.95,48.58 106.68,49.85 v104.78,49.85 v96.2,49.85 | IC2.5 v104.78,43.5 | v95.25,38.42 IC1.35
  Bottom 0.406: v104.78,43.5 v104.78,49.85 | v95.25,38.42 95.25,44.45 96.2,45.4 v96.2,49.85
N$6  (via drill 0.4)
  Top 0.406: IC3.12 20,46.04 18.73,44.77 v7.3,44.77 | v7.3,23.18 IC15.13
  Bottom 0.406: v7.3,44.77 v7.3,23.18
N$7
  Top 0.406: IC10.13 20.95,20.64 19.68,21.91 13.34,21.91 12.06,20.64 IC15.12
N$8  (via drill 0.4)
  Top 0.406: IC3.11 20.64,43.5 19.37,42.23 v14.29,42.23 | v13.65,13.02 IC15.9
  Bottom 0.406: IC15.8 IC15.9 | v14.29,42.23 14.29,13.65 v13.65,13.02
N$9  (via drill 0.4)
  Top 0.406: v95.57,35.88 IC1.34 | v96.2,42.23 107,42.23 108.27,40.96 IC2.9
  Bottom 0.406: v95.57,35.88 95.57,37.15 96.2,37.78 v96.2,42.23
N$10  (via drill 0.4)
  Top 0.406: IC17.35 v143.51,38.42 | v137.79,81.6 101.92,81.6 100.01,79.69 79.06,79.69 76.2,82.55 73.66,82.55 71.12,85.09 56.52,85.09 55.88,85.72 v53.34,85.72
  Bottom 0.406: v143.51,38.42 143.51,69.53 139.38,73.66 139.38,80.01 v137.79,81.6 | v53.34,85.72 IC18.6
N$11  (via drill 0.4)
  Top 0.406: IC3.10 v20.95,40.96 | v20.95,60.33 IC11.9 | IC3.1 v20.95,51.12
  Bottom 0.406: v20.95,40.96 v20.95,51.12 v20.95,60.33
N$12  (via drill 0.4)
  Top 0.406: IC7.22 53.02,30.8 51.75,29.53 46.67,29.53 45.4,30.8 38.42,30.8 37.15,32.07 32.07,32.07 30.16,33.97 20,33.97 19.37,33.34 14.61,33.34 13.02,31.75 v4.13,31.75 | IC15.4 v4.13,18.1
  Bottom 0.406: v4.13,18.1 v4.13,31.75
N$13  (via drill 0.4)
  Top 0.406: IC10.12 21.59,18.1 20.32,19.37 v5.08,19.37 | v5.08,23.18 IC15.2
  Bottom 0.406: v5.08,19.37 v5.08,23.18
N$14  (via drill 0.4)
  Top 0.406: IC3.3 18.73,46.04 v20,47.31 | v20,77.79 20,78.74 25.4,84.14 v53.34,84.14
  Bottom 0.406: v20,47.31 v20,77.79 | v53.34,84.14 IC18.9
N$15  (via drill 0.4)
  Top 0.406: IC11.11 v19.05,65.41 | v19.05,34.61 v5.08,34.61 | v5.08,25.72 IC15.1
  Bottom 0.406: v19.05,65.41 v19.05,34.61 | v5.08,34.61 v5.08,25.72
N$16  (via drill 0.4)
  Top 0.406: IC7.24 v53.34,25.72
  Bottom 0.406: v53.34,25.72 53.34,30.16 52.7,30.8 52.7,47.31 51.44,48.58 51.44,60.96 50.8,61.59 IC18.8
N$17  (via drill 0.4)
  Top 0.406: IC6.22 v36.2,25.72 | v35.56,77.47 v58.42,77.47
  Bottom 0.406: v36.2,25.72 36.2,44.13 35.56,44.77 v35.56,77.47 | v58.42,77.47 IC18.11
N$18
  Top 0.406: IC13.19 57.47,73.03 58.74,71.75 60.64,71.75 61.91,73.03 IC9.2
N$19  (via drill 0.4)
  Top 0.406: IC15.10 v11.43,15.56 | v11.43,52.7 30.16,52.7 31.43,51.44 53.02,51.44 54.29,52.7 IC13.11
  Bottom 0.406: v11.43,15.56 v11.43,52.7
N$21  (via drill 0.4)
  Top 0.406: IC16.8 v121.92,38.42 | v121.92,51.12 IC16.13
  Bottom 0.406: v121.92,38.42 v121.92,51.12
N$23  (via drill 0.4)
  Top 0.406: v60.96,78.42 34.92,78.42 33.66,77.15 v30.8,77.15 | v29.21,35.88 IC3.8
  Bottom 0.406: IC18.12 v60.96,78.42 | v30.8,77.15 30.8,44.77 29.21,43.18 v29.21,35.88
N$24  (via drill 0.4)
  Top 0.406: IC10.14 30.48,23.18 31.75,21.91 43.18,21.91 44.45,20.64 v45.72,20.64 | v45.72,3.49 59.69,3.49 61.59,1.59 111.12,1.59 112.39,2.86 IC12.13
  Bottom 0.406: v45.72,20.64 v45.72,3.49
N$25  (via drill 0.4)
  Top 0.406: JP2.1 147.64,84.77 146.05,83.19 146.05,80.96 145.41,80.33 140.65,80.33 138.11,82.87 v123.19,82.87
  Bottom 0.406: v123.19,82.87 IC5.5
N$26
  Bottom 0.406: LED1.A R17.2
N$28
  Top 0.406: IC17.31 JP3.2
N$29
  Top 0.406: IC17.30 JP3.3
N$30  (via drill 0.4)
  Top 0.406: v93.34,53.66 RN1.2
  Bottom 0.406: IC1.40 v93.34,53.66
N$31  (via drill 0.4)
  Top 0.406: IC17.11 v141.29,25.72 | v141.29,44.77 149.86,44.77 151.13,46.04 JP1.3
  Bottom 0.406: v141.29,25.72 v141.29,44.77
N$32  (via drill 0.4)
  Top 0.406: JP1.2 151.13,48.58 149.86,47.31 v142.24,47.31 | v142.24,28.26 IC17.10
  Bottom 0.406: v142.24,47.31 v142.24,28.26
N$33  (via drill 0.4)
  Top 0.406: IC3.6 v20.64,38.42 | v20.64,33.02 29.84,33.02 32.07,30.8 IC6.20
  Bottom 0.406: v20.64,38.42 v20.64,33.02
N$34  (via drill 0.4)
  Top 0.406: IC17.7 v143.19,35.88 | v143.19,21.91 149.86,21.91 151.13,20.64 JP3.5
  Bottom 0.406: v143.19,35.88 v143.19,21.91
N$35
  Top 0.406: IC17.4 135.25,43.5 136.53,42.23 150.18,42.23 151.45,40.96 JP1.5
N$36
  Top 0.406: IC1.36 RN1.7
N$37
  Top 0.406: IC1.33 RN1.10
N$38  (via drill 0.4)
  Top 0.406: IC1.3 90.17,46.04 91.44,47.31 94.61,47.31 95.89,48.58 RN1.4 | v118.11,80.33 v102.87,80.33
  Bottom 0.406: IC5.7 v118.11,80.33 | v102.87,80.33 102.87,76.52 101.92,75.56 101.92,64.45 100.01,62.55 100.01,49.53 99.06,48.58 RN1.4
N$39  (via drill 0.4)
  Top 0.406: IC17.29 v150.81,23.18 | v150.81,30.8 JP3.1
  Bottom 0.406: v150.81,23.18 v150.81,30.8
N$40
  Top 0.406: JP2.5 147.32,74.61 144.15,71.44 137.48,71.44 135.89,69.85 IC5.24
N$41
  Top 0.406: R2.2 LED3.K
N$42
  Top 0.406: IC1.2 90.17,48.58 91.44,49.85 94.61,49.85 95.89,51.12 RN1.3
N$43  (via drill 0.4)
  Top 0.406: JP1.1 151.13,51.12 149.86,49.85 v140.34,49.85 | v140.34,23.18 IC17.12
  Bottom 0.406: v140.34,49.85 v140.34,23.18
N$44
  Top 0.406: LED2.K R1.2
N$45  (via drill 0.4)
  Top 0.406: JP2.2 148.27,82.23 147,80.96 147,79.38 145.73,78.11 132.4,78.11 130.18,80.33 v120.65,80.33
  Bottom 0.406: v120.65,80.33 IC5.6
N$46  (via drill 0.4)
  Top 0.406: 150.81,79.69 JP2.3 148.59,79.69 146.37,77.47 v130.81,77.47
  Bottom 0.406: v130.81,77.47 IC5.2
N$47  (via drill 0.4)
  Top 0.406: 41.27,74.3 38.1,74.3 36.83,75.56 IC8.1 31.75,75.56 30.48,74.3 v14.92,74.3 | 41.27,74.3 IC8.19 | IC9.1 63.5,74.3 | 63.5,74.3 66.67,74.3 67.94,73.03 IC9.19 | 41.27,74.3 63.5,74.3 | IC4.9 v14.61,57.78
  Bottom 0.406: v14.61,57.78 14.61,67.63 14.92,67.94 v14.92,74.3
N$48  (via drill 0.4)
  Top 0.406: IC8.18 v39.05,70.48 | v38.42,55.88 36.2,55.88 35.56,55.24 IC8.9 | v40.01,9.21 57.47,9.21 58.74,7.94 v68.26,7.94 | v68.26,13.02 IC7.4
  Bottom 0.406: v39.05,70.48 39.05,66.67 39.37,66.36 39.37,58.74 38.42,57.78 v38.42,55.88 38.42,46.99 40.01,45.4 v40.01,9.21 | v68.26,7.94 v68.26,13.02
N$49  (via drill 0.4)
  Top 0.406: IC8.16 v38.42,65.41 | v38.42,59.69 36.2,59.69 35.56,60.33 IC8.7 | v53.66,15.56 IC7.28 | v38.73,25.72 45.09,25.72 46.35,24.45 v51.44,24.45
  Bottom 0.406: v38.42,65.41 v38.42,59.69 38.42,59.05 37.47,58.1 37.47,46.35 38.73,45.09 v38.73,25.72 | v51.44,24.45 51.44,21.27 53.66,19.05 v53.66,15.56
N$50  (via drill 0.4)
  Top 0.406: IC8.5 35.56,65.41 36.2,64.77 v37.47,64.77 | v37.47,60.96 38.73,60.96 39.37,60.33 IC8.14 43.18,60.33 44.45,59.05 v53.34,59.05 | v53.34,53.98 v67.31,53.98 | v66.04,10.48 IC7.3
  Bottom 0.406: v37.47,64.77 v37.47,60.96 | v53.34,59.05 v53.34,53.98 | v67.31,53.98 67.31,46.35 65.72,44.77 65.72,23.5 66.04,23.18 v66.04,10.48
N$51  (via drill 0.4)
  Top 0.406: IC8.3 v36.51,70.48 | v36.51,54.61 38.73,54.61 39.37,55.24 IC8.12 | v37.47,7.94 IC7.31
  Bottom 0.406: v36.51,70.48 v36.51,54.61 36.51,45.72 37.47,44.77 v37.47,7.94
N$52
  Top 0.406: IC13.12 58.74,55.24 61.28,57.78 IC9.8
N$53  (via drill 0.4)
  Top 0.406: v63.5,83.19 49.53,83.19 46.67,80.33 34.29,80.33 33.02,79.06 30.8,79.06 v29.84,78.11
  Bottom 0.406: v29.84,78.11 29.84,45.4 28.26,43.81 28.26,36.51 26.99,35.24 26.99,27.3 25.4,25.72 IC10.15 | v63.5,83.19 IC18.2
N$54
  Top 0.406: IC13.16 58.74,65.41 61.28,67.94 IC9.4
N$55
  Top 0.406: IC13.15 IC9.6
N$56  (via drill 0.4)
  Top 0.406: IC9.18 v69.22,70.48 | v69.22,56.52 66.67,56.52 65.41,55.24 IC9.9
  Bottom 0.406: v69.22,70.48 v69.22,56.52 69.22,45.4 68.58,44.77 68.58,18.41 69.22,17.78 69.22,8.89 70.17,7.94 IC7.2
N$57  (via drill 0.4)
  Top 0.406: IC9.16 69.53,65.41 68.26,66.67 v65.41,66.67 | v65.41,60.33 IC9.7 | IC7.30 v64.77,10.48
  Bottom 0.406: v65.41,66.67 v65.41,60.33 65.41,46.04 64.77,45.4 64.77,23.18 65.09,22.86 65.09,10.79 v64.77,10.48
N$58  (via drill 0.4)
  Top 0.406: IC9.14 v68.26,60.33 | v68.26,65.41 IC9.5 | IC7.1 v67.31,5.4
  Bottom 0.406: v68.26,65.41 v68.26,60.33 68.26,45.72 67.63,45.09 67.63,23.5 67.31,23.18 v67.31,5.4
N$59  (via drill 0.4)
  Top 0.406: IC9.12 v67.31,55.24 | v67.31,70.48 IC9.3
  Bottom 0.406: v67.31,55.24 v67.31,70.48
N$60  (via drill 0.4)
  Top 0.406: v128.91,9.21 v141.29,9.21 | v141.29,15.56 IC17.26
  Bottom 0.406: R2.1 v128.91,9.21 | v141.29,9.21 v141.29,15.56
N$61
  Top 0.406: IC13.9 46.67,55.24 45.4,56.52 39.69,56.52 38.42,57.78 IC8.8
N$62
  Top 0.406: IC13.6 44.77,62.87 43.5,61.59 39.37,61.59 38.73,62.23 36.2,62.23 35.56,62.87 IC8.6
N$63
  Top 0.406: IC13.5 44.45,65.41 43.18,66.67 36.51,66.67 35.24,67.94 IC8.4
N$64
  Top 0.406: IC13.2 46.67,73.03 45.4,71.75 37.15,71.75 35.88,73.03 IC8.2
N$65
  Top 0.406: R1.1 IC17.15
N$66
  Top 0.406: R3.1 97.16,72.07 98.74,70.48 102.23,70.48 103.82,68.9 103.82,67.94 105.09,66.67 109.54,66.67 110.17,66.04 110.17,63.5 CON1.45 110.17,62.5
N$67
  Top 0.406: LED4.K R3.2
N$68  (via drill 0.4)
  Top 0.406: CON1.44 111.44,59.05 110.17,57.78 v101.28,57.78 | v102.87,74.61 R5.1
  Bottom 0.406: v101.28,57.78 101.28,62.55 102.87,64.14 v102.87,74.61
N$69  (via drill 0.4)
  Top 0.406: 121.6,62.5 121.6,62.87 CON1.36 121.6,65.09 v121.92,65.41 | v121.92,78.42 102.23,78.42 100.97,77.15 R4.1
  Bottom 0.406: v121.92,65.41 v121.92,78.42
N$71  (via drill 0.4)
  Top 0.406: v62.23,77.47 73.03,77.47 75.88,74.61 81.28,74.61 82.55,75.88 101.6,75.88 103.19,77.47 v111.76,77.47
  Bottom 0.406: IC18.3 60.96,84.45 62.23,83.19 v62.23,77.47 | v111.76,77.47 111.76,80.33 113.03,81.6 IC5.9
PDIAG  (via drill 0.4)
  Top 0.406: CON1.46 108.9,60.01 v107.63,58.74 | v107.63,37.15 101.6,37.15 100.33,38.42 RN1.8
  Bottom 0.406: v107.63,58.74 v107.63,37.15
RDN  (via drill 0.4)
  Top 0.406: v78.11,53.34 87.31,53.34 88.27,52.39 107,52.39 109.54,49.85 112.71,49.85 113.98,48.58 IC16.3 119.7,48.58 120.97,47.31 v123.83,47.31 | CON1.34 v124.14,60.96 | v78.11,61.59 v53.98,61.59
  Bottom 0.406: v124.14,60.96 124.14,59.37 124.46,59.05 124.46,56.52 123.83,55.88 v123.83,47.31 | v78.11,53.34 v78.11,61.59 | v53.98,61.59 53.98,76.52 55.88,78.42 IC18.10
RESET  (via drill 0.4)
  Top 0.406: IC1.37 RN1.6 | S1.1 S1.2 38.14,81.88 38.1,81.92 v33.66,81.92 32.38,81.92 32.07,81.6 v26.99,81.6 | IC1.37 95.89,43.5 | IC12.7 v99.69,15.56 | v26.99,62.87 IC11.10 | IC17.34 145.41,35.88 144.15,37.15 130.49,37.15 129.54,36.2 101.28,36.2 100.65,36.83 v100.01,36.83 | IC1.37 v86.04,43.5 | v86.04,69.22 v43.18,69.22
  Bottom 0.406: v99.69,15.56 99.69,31.75 100.01,32.07 v100.01,36.83 100.01,42.86 99.38,43.5 RN1.6 | v26.99,81.6 v26.99,62.87 | v86.04,43.5 v86.04,69.22 | v43.18,69.22 43.18,77.79 45.09,79.69 45.09,81.8 S1.1 | C7.+ v33.66,81.92
RW  (via drill 0.4)
  Top 0.406: v115.89,29.53 104.14,29.53 102.87,30.8 IC1.32 v91.12,30.8 | v115.89,14.29 113.35,14.29 112.08,13.02 IC12.8 | IC3.4 19.05,43.5 20.32,44.77 31.11,44.77 32.07,45.72 72.71,45.72 73.66,44.77 v82.23,44.77 | v91.12,37.15 88.9,37.15 87.31,38.73 v82.23,38.73 | IC17.8 130.18,33.34 129.22,34.29 v127.64,34.29 v116.52,34.29 | v124.46,71.75 v105.41,71.75 | IC16.2 120.02,51.12 121.28,49.85 v127.64,49.85
  Bottom 0.406: v115.89,14.29 v115.89,29.53 115.89,31.75 116.52,32.38 v116.52,34.29 | v91.12,30.8 v91.12,37.15 | v82.23,38.73 v82.23,44.77 | v105.41,71.75 IC5.13 | IC16.9 127.64,40.96 | 127.64,40.96 v127.64,34.29 | v124.46,71.75 124.46,68.58 126.36,66.67 126.36,62.55 127.64,61.28 v127.64,49.85 127.64,43.5 | 127.64,43.5 127.64,40.96 | IC16.10 127.64,43.5
SCLK  (via drill 0.4)
  Top 0.406: IC17.32 v144.46,30.8 | v144.46,56.52 152.08,56.52 154.31,58.74 QG2.5 | IC5.4 IC5.3 | v144.46,73.66 130.49,73.66 129.86,74.3 v128.27,74.3
  Bottom 0.406: v144.46,30.8 v144.46,56.52 v144.46,73.66 | v128.27,74.3 IC5.3
SEREN  (via drill 0.4)
  Top 0.406: IC10.10 30.48,13.02 31.75,11.75 38.1,11.75 39.37,10.48 v44.45,10.48 | v60.96,46.67 v47.62,46.67
  Bottom 0.406: IC18.4 58.42,84.45 59.69,83.19 59.69,78.11 60.96,76.83 v60.96,46.67 | v47.62,46.67 47.62,45.4 46.99,44.77 46.99,40.32 46.67,40.01 46.67,25.08 44.45,22.86 v44.45,10.48
WRN  (via drill 0.4)
  Top 0.406: CON1.35 v122.87,60.96 | v122.87,46.04 IC16.11 | v125.73,24.45 v103.5,24.45 | v103.5,18.1 99.69,18.1 98.42,16.83 v63.18,16.83 | v63.18,13.02 IC7.29
  Bottom 0.406: v122.87,60.96 122.87,59.69 121.92,58.74 121.92,54.61 122.87,53.66 v122.87,46.04 122.87,33.34 125.73,30.48 v125.73,24.45 | v103.5,24.45 v103.5,18.1 | v63.18,16.83 v63.18,13.02

## Text on the board
tTest: DTR | RX | TX | CTS | GND